# EAGLE board attiny_eval (EAGLE 6.2)
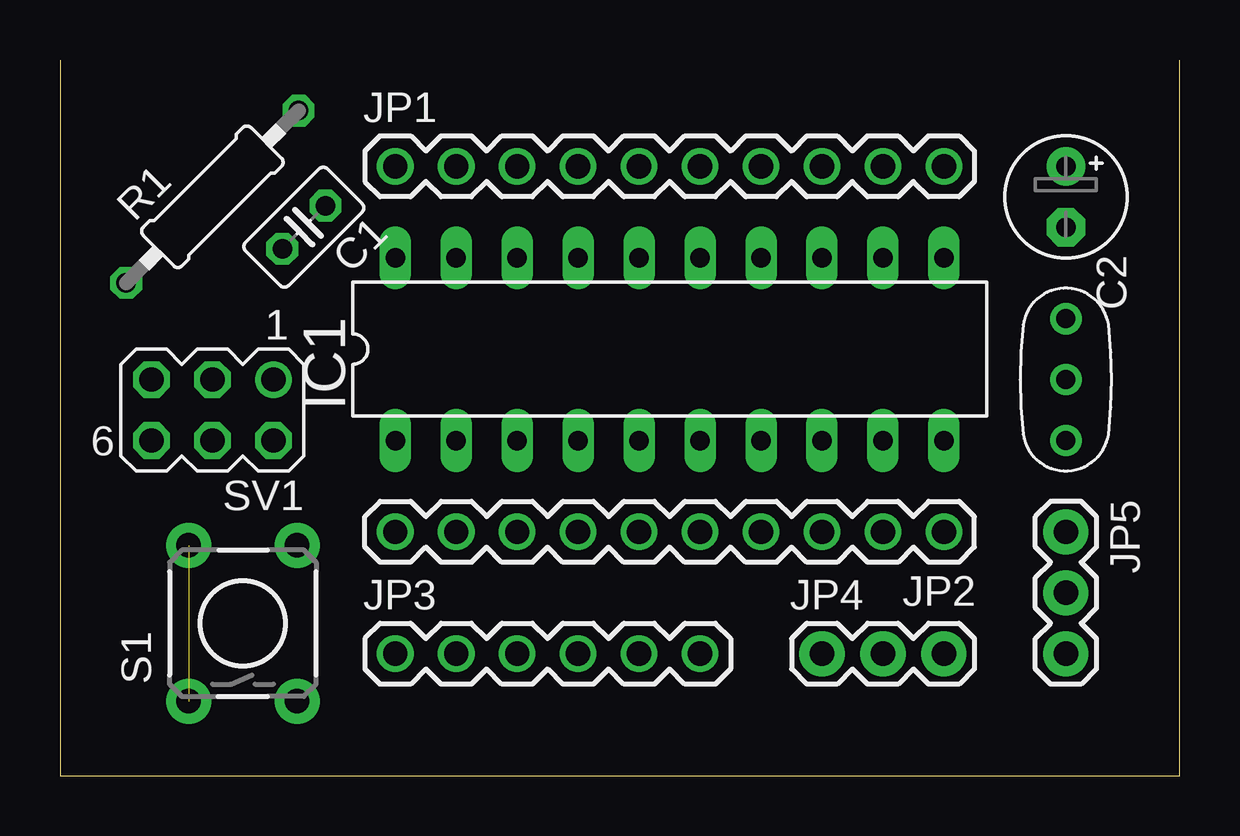
[diagram p0: board, top side]
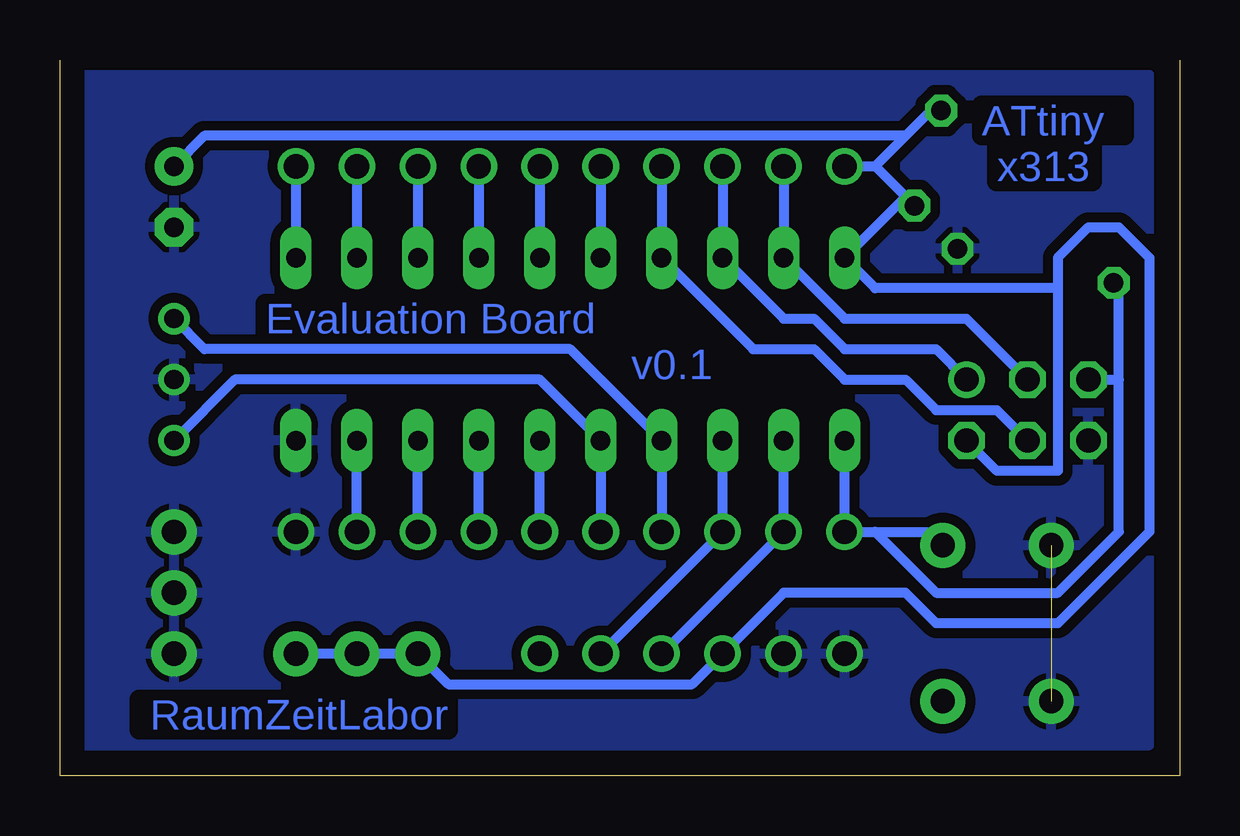
[diagram p1: board, bottom side, seen from below]

Size 46.66 x 29.84 mm. Coordinates in mm from the lower left corner, seen from the top.
Outline: 46.66,29.84 46.66,0 0,0 0,29.84
Copper layers (1*16): Top 0.035mm / dielectric 1.5mm / Bottom 0.035mm
Design rules: minimum track width 16mil, minimum drill 24mil, track to track 8mil, track to pad 8mil, pad to pad 8mil, via to via 8mil, smd to smd 8mil, copper to edge 40mil, drill to drill 8mil, minimum pad ring 10mil, minimum via ring 8mil, stop-mask expansion 4mil, vias tented up to drill 0mil, thermal gap 10mil

## Footprints (pad centres in the part's own frame; a part is rotated, then mirrored left to right if it is on the bottom)
C025-025X050 = drill 0.813 octagon: 1 -1.27,0; 2 1.27,0
E2,5-5 = drill 0.813 pad 1.6: + -1.27,0 | drill 0.813 pad 1.6 octagon: - 1.27,0
DIL20 = drill 0.813 long: 1 -11.43,-3.81; 2 -8.89,-3.81; 3 -6.35,-3.81; 4 -3.81,-3.81; 5 -1.27,-3.81; 6 1.27,-3.81; 7 3.81,-3.81; 8 6.35,-3.81; 9 8.89,-3.81; 10 11.43,-3.81; 11 11.43,3.81; 12 8.89,3.81; 13 6.35,3.81; 14 3.81,3.81; 15 1.27,3.81; 16 -1.27,3.81; 17 -3.81,3.81; 18 -6.35,3.81; 19 -8.89,3.81; 20 -11.43,3.81
1X10 = drill 1.016: 1 0,0; 2 2.54,0; 3 5.08,0; 4 7.62,0; 5 10.16,0; 6 12.7,0; 7 15.24,0; 8 17.78,0; 9 20.32,0; 10 22.86,0
1X06 = drill 1.016: 1 0,0; 2 2.54,0; 3 5.08,0; 4 7.62,0; 5 10.16,0; 6 12.7,0
1X03 = drill 1.016 pad 1.88: 1 0,0; 2 2.54,0; 3 5.08,0
0207/10 = drill 0.813 octagon: 1 -5.08,0; 2 5.08,0
TACTILE-PTH = drill 1.016 pad 1.88: 1 -3.251,2.261; 2 3.251,2.261; 3 -3.251,-2.261; 4 3.251,-2.261
MA03-2 = drill 1.016: 1 -2.54,-1.27 | drill 1.016 octagon: 2 -2.54,1.27; 3 0,-1.27; 4 0,1.27; 5 2.54,-1.27; 6 2.54,1.27
RESONATOR-PTH = drill 0.8: 1 -2.54,0; 2 0,0; 3 2.54,0

## Placement (x,y rotation side)
C1  100n  [C025-025X050]  10.16,22.86 225 top
C2  100u  [E2,5-5]  41.91,24.13 270 top
IC1  ATtiny2313  [DIL20]  25.4,17.78 0 top
JP1  [1X10]  13.97,25.4 0 top
JP2  [1X10]  36.83,10.16 180 top
JP3  [1X06]  13.97,5.08 0 top
JP4  [1X03]  31.75,5.08 0 top
JP5  [1X03]  41.91,10.16 270 top
R1  10k  [0207/10]  6.35,24.13 45 top
S1  [TACTILE-PTH]  7.62,6.35 90 top
SV1  [MA03-2]  6.35,15.24 180 top
U$2  8MHz  [RESONATOR-PTH]  41.91,16.51 270 top

## Library data of the parts
C1 C2 R1 = rcl
IC1 = avr
JP1-JP3 U$2 = SparkFun
JP4 JP5 = SparkFun-Connectors
S1 = SparkFun-Electromechanical
SV1 = con-lstb; OC_FARNELL: unknown; OC_NEWARK: unknown

## Nets
GND: C1.2 C2.- IC1.10 JP2.1 JP3.1 JP3.2 JP5.1 JP5.2 JP5.3 S1.1 S1.2 SV1.6 U$2.2
N$2: IC1.4 JP2.7 U$2.1
N$3: IC1.5 JP2.6 U$2.3
N$4: IC1.1 JP2.10 R1.1 S1.4 SV1.5
N$5: IC1.19 JP1.2 SV1.3
N$6: IC1.18 JP1.3 SV1.1
N$7: IC1.17 JP1.4 SV1.4
N$8: IC1.16 JP1.5
N$9: IC1.15 JP1.6
N$10: IC1.14 JP1.7
N$11: IC1.13 JP1.8
N$12: IC1.12 JP1.9
N$13: IC1.11 JP1.10
N$14: IC1.9 JP2.2
N$15: IC1.8 JP2.3
N$16: IC1.7 JP2.4
N$17: IC1.6 JP2.5
N$18: IC1.3 JP2.8 JP3.5
RX: IC1.2 JP2.9 JP3.4
VCC: C1.1 C2.+ IC1.20 JP1.1 JP3.3 JP4.1 JP4.2 JP4.3 R1.2 SV1.2

## Tracks (layer width: path | path; a pad name or v marks a point on that pad's centre or on a via)
GND  (1 unrouted)
  Bottom 0.508: JP5.1 41.86,10.11
  pour Bottom (isolate 0.406): 1.27,29.21 45.72,29.21 45.72,1.27 1.27,1.27
N$2
  Bottom 0.406: U$2.1 40.64,17.78 25.4,17.78 IC1.4 JP2.7
N$3
  Bottom 0.406: U$2.3 39.37,16.51 26.67,16.51 IC1.5 JP2.6
N$4
  Bottom 0.406: 2.54,16.51 2.54,20.32 R1.1 | SV1.5 2.54,16.51 | JP2.10 IC1.1 | JP2.10 10.16,10.16 S1.4 | 2.54,16.51 2.54,10.16 5.08,7.62 10.16,7.62 12.7,10.16 JP2.10
N$5
  Bottom 0.406: JP1.2 IC1.19 13.97,19.05 8.89,19.05 SV1.3
N$6
  Bottom 0.406: JP1.3 IC1.18 16.51,19.05 15.24,19.05 13.97,17.78 10.16,17.78 SV1.1
N$7
  Bottom 0.406: JP1.4 IC1.17 17.78,17.78 15.24,17.78 13.97,16.51 11.43,16.51 10.16,15.24 7.62,15.24 SV1.4
N$8
  Bottom 0.406: JP1.5 IC1.16
N$9
  Bottom 0.406: JP1.6 IC1.15
N$10
  Bottom 0.406: JP1.7 IC1.14
N$11
  Bottom 0.406: JP1.8 IC1.13
N$12
  Bottom 0.406: JP1.9 IC1.12
N$13
  Bottom 0.406: JP1.10 IC1.11
N$14
  Bottom 0.406: JP2.2 IC1.9
N$15
  Bottom 0.406: JP2.3 IC1.8
N$16
  Bottom 0.406: JP2.4 IC1.7
N$17
  Bottom 0.406: JP2.5 IC1.6
N$18
  Bottom 0.406: IC1.3 JP2.8 JP3.5
RX
  Bottom 0.406: IC1.2 JP2.9 JP3.4
VCC
  Bottom 0.406: 12.7,25.4 11.43,26.67 | 11.43,26.67 10.16,27.94 R1.2 | JP1.1 12.7,25.4 | 12.7,25.4 11.43,24.13 | 11.43,24.13 IC1.20 12.7,20.32 5.08,20.32 | SV1.2 7.62,12.7 5.08,12.7 5.08,20.32 | 11.43,24.13 C1.1 | JP4.3 JP4.2 JP4.1 30.48,3.81 20.32,3.81 JP3.3 16.51,7.62 11.43,7.62 10.16,6.35 5.08,6.35 1.27,10.16 1.27,21.59 2.54,22.86 3.81,22.86 5.08,21.59 5.08,20.32 | C2.+ 40.64,26.67 11.43,26.67

## Text on the board
Bottom: ATtiny | x313 | Evaluation Board | v0.1 | RaumZeitLabor